# Altium PCB PCB_18_R2.PcbDoc (part 2 of 3)
Units mm, origin at the board's own origin, x right, y up, seen from the top; angles counter-clockwise.
Board outline 255 x 215.3 mm, 2 copper layers (Top Layer, Bottom Layer), stack 1.071 mm thick; 236 components, 0 nets, 1421 pads, 588 vias.
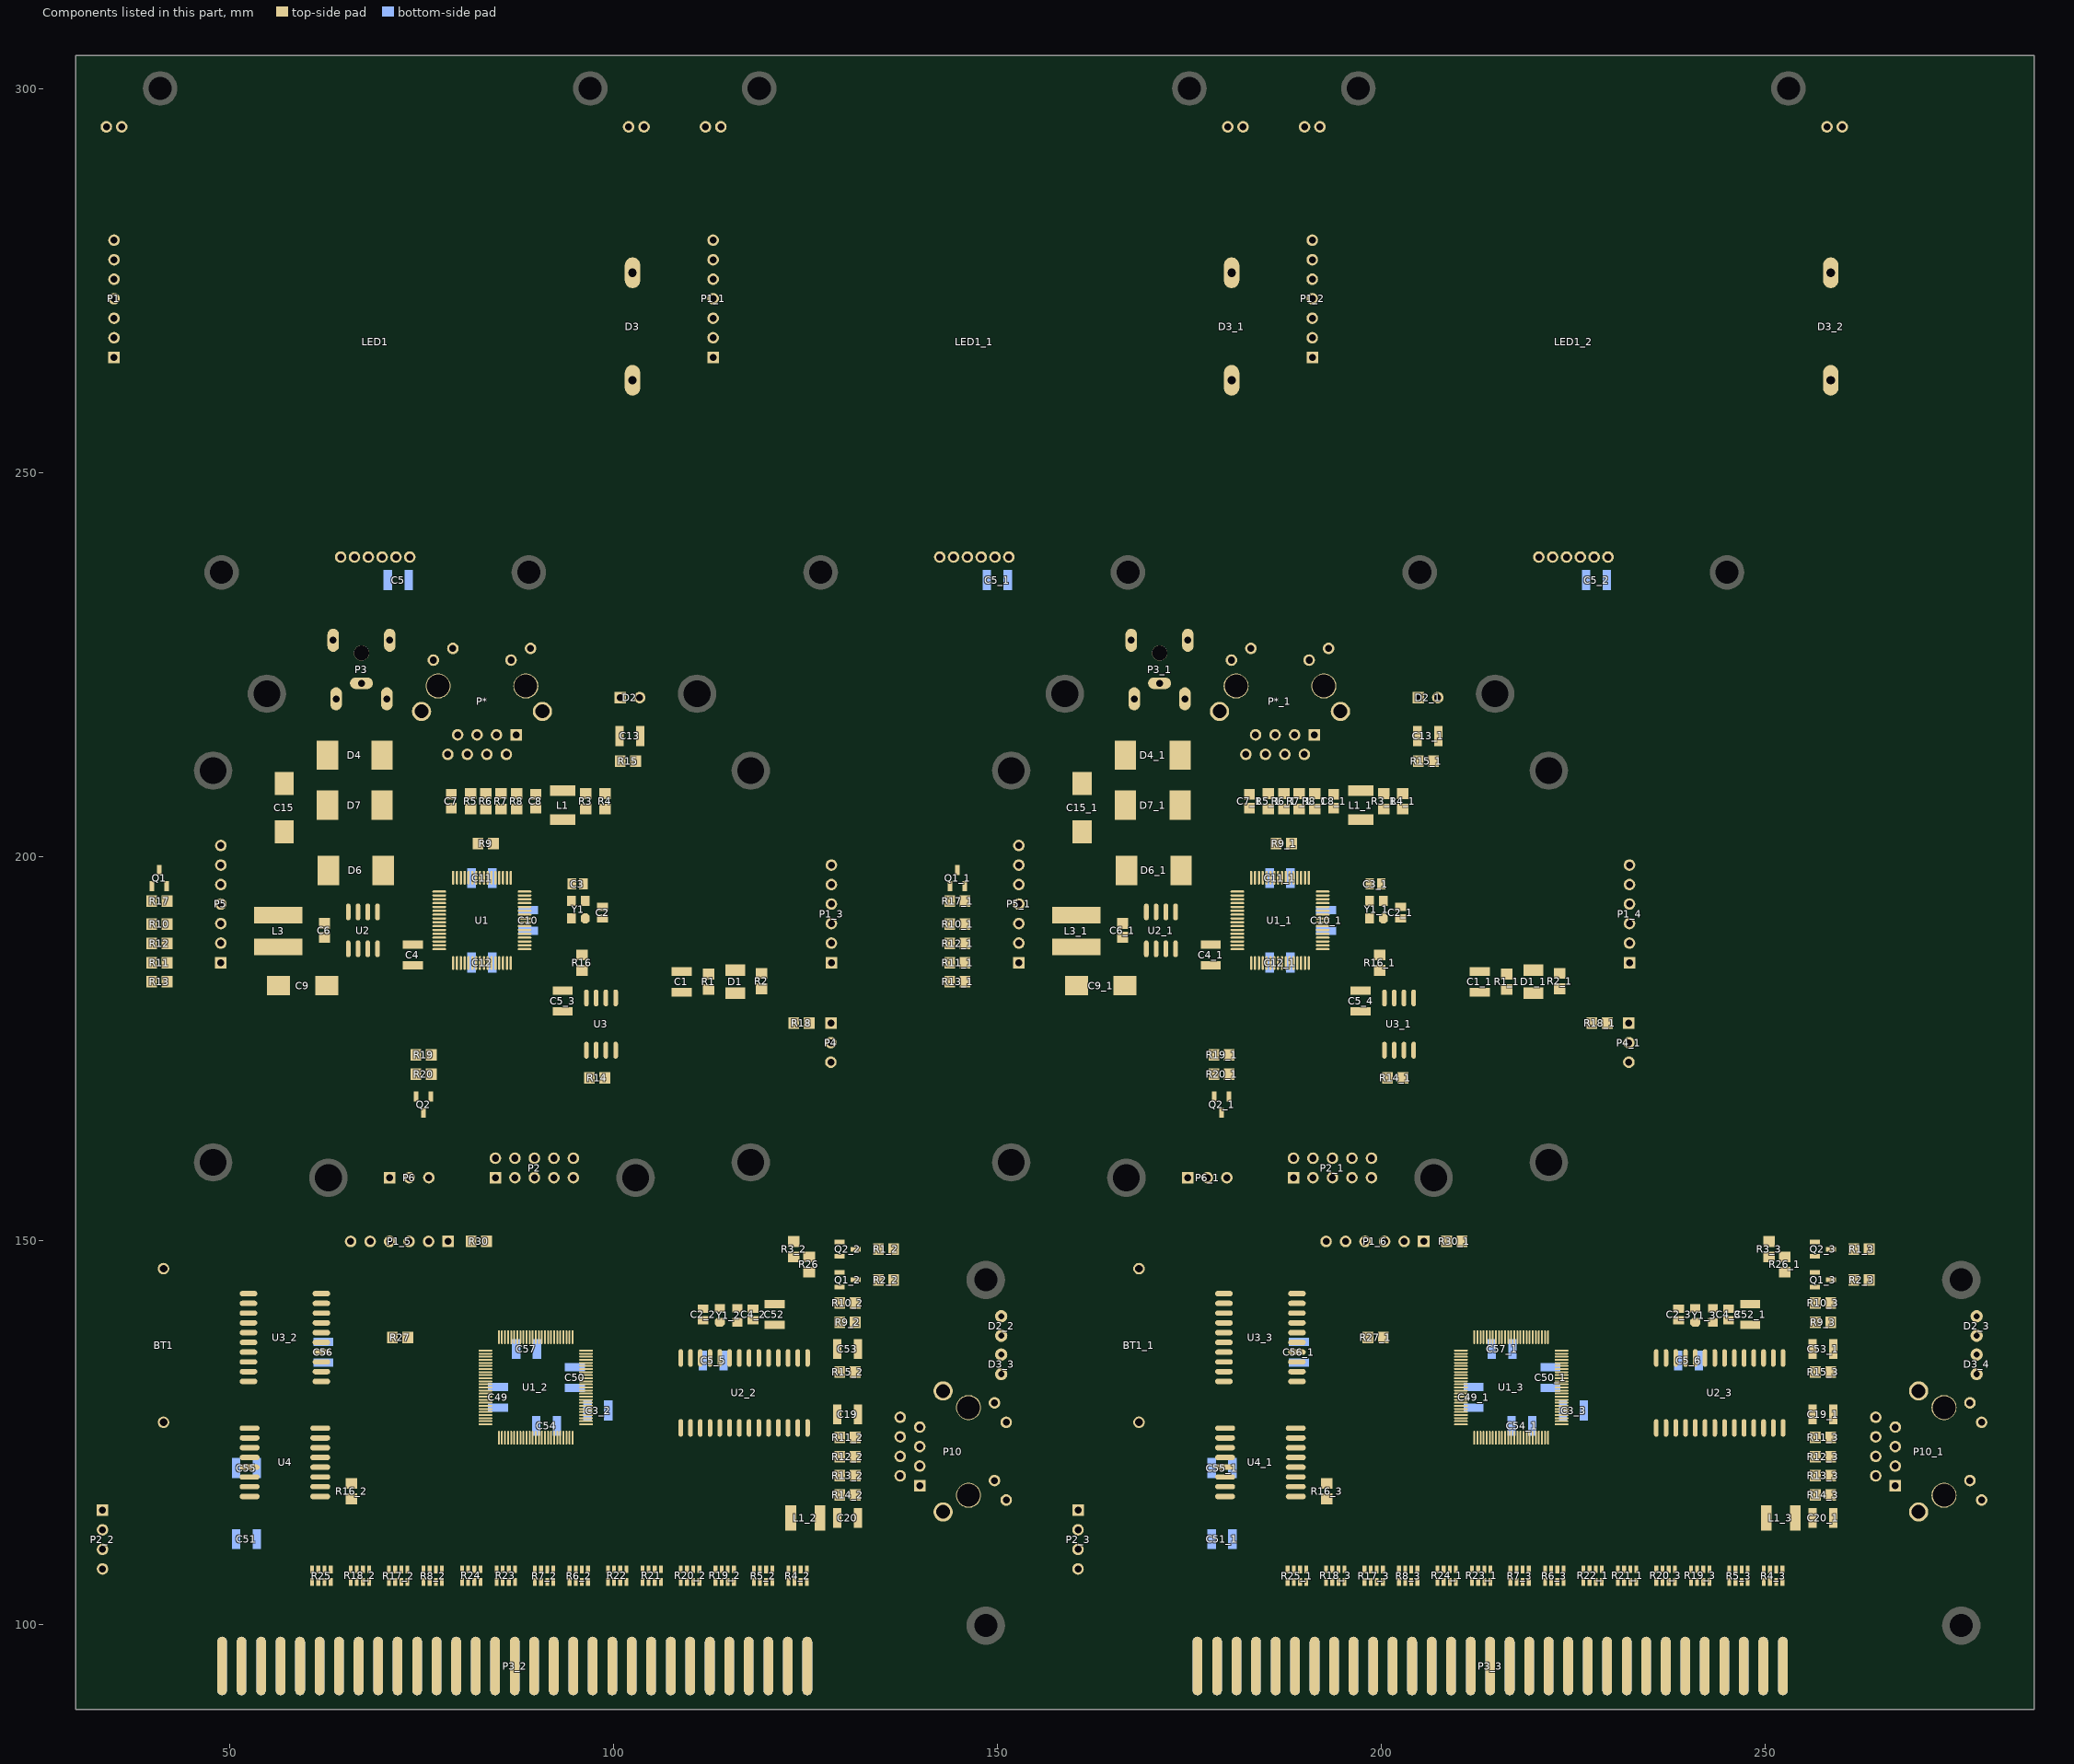
[diagram p2: the components of this part, seen from the top]

## Via types
v1: diameter 1.2, hole 0.6, Top Layer to Bottom Layer, 588 vias

## Nets (pads, with @x,y where several pads share a name; then routed paths per layer and width w, separated by ;. In a path a pad name is that pad's centre, name@x,y a point inside that pad or via, vN(x,y) a via of type N, cw(c..) or ccw(c..) an arc to the next point about the centre after c; other vN are vias at no path point) (continued)
copper on no net: | length 17755.7
  Top Layer w0.2: 52.65,125.595 v1@58.5,125.595 ; 61.85,124.325 64.425,124.325 v1(65,124.9) ; 62,131.685 64.715,131.685 v1(65,131.4) ; 62,136.765 64.265,136.765 66,138.5 v1(66,140.4) ; 70.8,107.2 70.8,109.35 70.5,109.65 70.5,130.9 73.5,133.9 78.6,133.9 79.2,133.3 83.35,133.3 ; 71.4,137.4 71.4,144.9 72.1,145.6 80.94,145.6 87.5,139.04 87.5,137.45 ; 71.6,107.2 71.6,109.31 71,109.91 71,130.65 73.75,133.4 78.4,133.4 78.9,132.9 83.35,132.9 ; 72.4,107.2 72.4,109.25 71.5,110.15 71.5,130.4 74,132.9 78.3,132.9 78.7,132.5 83.35,132.5 ; v1(72.5,142.4) 76.5,138.4 78.6,138.4 81.7,135.3 83.35,135.3 ; v1(72.6,144.4) 73.5,143.5 73.5,142 76.646,138.854 78.746,138.854 81.9,135.7 83.35,135.7 ; 73.2,107.2 73.2,109.2 72,110.4 72,130.15 74.25,132.4 77.9,132.4 78.2,132.1 83.35,132.1 ; v1(74,109.9) 72.5,111.4 72.5,128.15 74.45,130.1 83.35,130.1 ; v1(75,131.4) 75.9,130.5 83.35,130.5 ; 75.3,107.2 75.3,110.1 73,112.4 73,127.976 74.724,129.7 83.35,129.7 ; v1(76,115.4) 79.858,115.4 87.1,122.642 87.1,124.35 ; 76.1,107.2 76.1,110.05 73.5,112.65 73.5,127.834 74.966,129.3 83.35,129.3 ; 76.9,107.2 76.9,109.9 74.046,112.754 74.046,127.738 75.208,128.9 83.35,128.9 ; v1(77,113.4) 78.5,113.4 87.5,122.4 87.5,124.35 ; v1(77,117.9) 76,118.9 76,125.2 77.7,126.9 83.35,126.9 ; v1(77,119.9) 83.659,119.9 86.7,122.941 86.7,124.35 ; v1(77,121.9) 79.084,121.9 80.084,120.9 83.375,120.9 85.9,123.425 85.9,124.35 ; v1(77,124.9) 78.9,124.9 80.1,126.1 83.35,126.1 ; v1(77,131.4) 77.5,130.9 83.35,130.9 ; v1(77,135.9) 78.8,135.9 80.2,134.5 83.35,134.5 ; v1(77,141.4) 82.5,141.4 85.1,138.8 85.1,137.45 ; v1(77,143.4) 81.784,143.4 85.9,139.284 85.9,137.45 ; 77.7,107.2 77.7,109.7 74.5,112.9 74.5,127.55 75.45,128.5 83.35,128.5 ; v1(78,116.4) 76.7,116.4 75.5,117.6 75.5,125.342 77.458,127.3 83.35,127.3 ; v1(78.5,120.9) 78.954,120.446 83.563,120.446 86.3,123.183 86.3,124.35 ; v1(78.5,125.9) 79.1,126.5 83.35,126.5 ; v1(78.5,136.9) 80.5,134.9 83.35,134.9 ; v1(78.5,142.4) 82.142,142.4 85.5,139.042 85.5,137.45 ; v1(78.5,144.4) 81.426,144.4 86.3,139.526 86.3,137.45 ; 81.9,107.225 81.9,116 83.5,117.6 87.9,122 87.9,124.35 ; 82.7,107.225 82.7,116.1 88.3,121.7 88.3,124.35 ; 83.35,127.7 85.2,127.7 85.391,127.891 88.991,127.891 v1(90,128.9) 89.5,128.4 89.5,124.35 ; 83.35,128.1 84.55,128.1 85.35,128.9 v1(88,128.9) ; 83.35,131.3 87.6,131.3 v1(88,130.9) ; 83.35,131.7 86.8,131.7 v1(88,132.9) 87.2,133.7 83.35,133.7 ; 83.35,134.1 88.8,134.1 v1(90,132.9) 88.7,134.2 88.7,137.45 ; 84.8,107.225 84.8,117.6 88.7,121.5 88.7,124.35 ; 85.6,107.225 85.6,117.7 89.1,121.2 89.1,124.35 ; 87.9,137.45 87.9,143.44 88.462,144.002 88.462,148.722 89.601,149.862 101.908,149.862 107.47,144.3 107.47,125.03 109.875,122.625 110.146,122.354 111.954,122.354 ccw(c111.954,122.993) 112.593,122.993 112.593,125.638 ; 88.3,137.45 88.3,143 89.15,143.85 89.15,148.05 v1(89.5,148.4) ; 89.1,137.45 89.1,135.8 v1(92,132.9) ; 89.5,137.45 89.5,146.3 90.5,147.3 90.5,148.9 91.008,149.408 101.492,149.408 107.016,143.884 107.016,124.842 109.958,121.9 v1(114,121.9) ; v1(89.9,118.4) 89.9,124.35 ; 89.9,137.45 89.9,145.8 91.5,147.4 v1(91.5,148.4) ; 90.3,137.45 90.3,143.4 95.025,148.125 102.002,148.125 106.562,143.565 106.562,124.654 110.424,120.792 114.692,120.792 116.403,122.503 116.403,123 116.403,125.638 ; 90.7,124.35 90.7,127.6 v1(92,128.9) 94.7,126.2 94.7,124.35 94.7,123.45 95.25,122.9 v1(98.5,122.9) v1(98.5,116.7) ; 90.7,137.45 90.7,143.2 94.975,147.475 101.783,147.475 106.108,143.15 106.108,124.466 110.236,120.338 115.938,120.338 v1(116.5,120.9) ; 91.1,124.35 91.1,110.35 91.4,110.05 91.4,107.2 ; 91.1,137.45 91.1,142.9 95.075,146.875 101.595,146.875 105.654,142.816 105.654,124.278 110.048,119.884 117.084,119.884 ccw(c117.084,120.473) 117.673,120.473 117.673,125.638 ; 91.5,124.35 91.5,110.75 92.2,110.05 92.2,107.2 ; 91.5,137.45 91.5,139.4 v1(93,140.9) ; 91.9,124.35 91.9,114.079 93.754,112.225 106.275,112.225 108.8,109.7 108.8,107.225 ; 91.9,137.45 91.9,139.8 v1(93,140.9) ; 92.3,124.35 92.3,114.55 94.175,112.675 106.625,112.675 109.6,109.7 109.6,107.225 ; 92.3,137.45 92.3,140.2 v1(93,140.9) ; 92.7,124.35 92.7,115.025 94.6,113.125 107.2,113.125 110.4,109.925 110.4,107.225 ; 92.7,137.45 92.7,140.6 v1(93,140.9) ; 93.1,124.35 93.1,115.5 95.025,113.575 107.675,113.575 111.2,110.05 111.2,107.225 ; 93.1,137.45 93.1,139.026 v1(97.474,143.4) ; 93.5,124.35 93.5,115.9 95.375,114.025 108.35,114.025 108.975,113.4 115.8,113.4 118.3,110.9 118.3,107.2 ; 93.5,137.45 93.5,138.784 96.024,141.308 97.008,141.308 98.5,142.8 v1@98.5,145.107 ; 93.9,137.45 93.9,138.542 96.212,140.854 97.454,140.854 v1@99.5,142.9 ; 94.3,124.35 94.3,116.6 v1@95.25,115.65 ; 94.3,137.45 94.3,135.7 94.3,133.2 93,131.9 v1(92,130.9) 92.8,130.1 96.45,130.1 ; 94.7,137.45 94.7,138.7 96.4,140.4 98,140.4 100.5,142.9 v1(100.5,144.9) ; v1(95.5,143.4) 95.5,145.4 96.5,146.4 101.416,146.4 105.2,142.616 105.2,130.5 104.6,129.9 102.02,129.9 100.62,131.3 96.45,131.3 ; 96.45,126.1 97.411,126.1 109.626,113.886 115.935,113.886 ; 96.45,126.5 97.653,126.5 109.753,114.4 116.084,114.4 119.9,110.584 119.9,107.2 ; 96.45,126.9 97.895,126.9 109.895,114.9 116.226,114.9 120.7,110.426 120.7,107.2 ; 96.45,127.3 98.137,127.3 109.537,115.9 v1(110.5,115.9) ; 96.45,127.7 98.38,127.7 109.204,116.876 111.524,116.876 v1(112.5,115.9) ; 96.45,128.1 98.622,128.1 109.392,117.33 114.438,117.33 122.8,108.968 122.8,107.2 ; 96.45,128.5 98.864,128.5 109.559,117.805 114.605,117.805 123.6,108.81 123.6,107.2 ; 96.45,128.9 99.106,128.9 109.768,118.238 114.814,118.238 124.4,108.652 124.4,107.2 ; 96.45,129.3 99.348,129.3 109.956,118.692 115.002,118.692 121.228,112.466 125.2,108.494 125.2,107.2 ; 96.45,129.7 100.2,129.7 v1(101,128.9) ; 96.45,130.5 100.925,130.5 102.125,129.3 102.125,127.165 109.86,119.43 118.93,119.43 ccw(c118.93,120.713) 120.213,120.713 120.213,125.638 ; 96.45,131.7 100.8,131.7 102.1,130.4 104.3,130.4 104.8,130.9 104.8,142.3 101.2,145.9 97.5,145.9 v1(96.5,144.9) ; 96.45,132.1 101,132.1 101.7,131.4 v1(103.5,131.4) ; 96.45,132.5 v1@102,132.5 ; 96.45,132.9 101.1,132.9 101.6,133.4 v1(103.5,133.4) ; 96.45,133.3 100.9,133.3 v1(102,134.4) ; 96.45,133.7 99.8,133.7 101.5,135.4 v1(103.5,135.4) ; 96.45,134.1 99.3,134.1 101.6,136.4 v1(102,136.4) ; 96.45,134.5 98.7,134.5 101.6,137.4 v1(103.5,137.4) ; 96.45,134.9 98.4,134.9 101,137.5 101,139.4 v1(102,140.4) ; 96.45,135.3 98.2,135.3 100.5,137.6 100.5,140.4 101.5,141.4 v1(103.5,141.4) ; 96.45,135.7 97.8,135.7 100,137.9 100,140.8 101.6,142.4 v1(102,142.4) ; v1(101.1,118.4) 102.975,118.4 cw(c102.975,116.895) 104.039,117.959 ; 104.028,117.973 v1(106.7,115.3) ; 115.946,113.896 119.1,110.742 119.1,107.2 ; 179.65,125.595 v1@185.5,125.595 ; 188.85,124.325 191.425,124.325 v1(192,124.9) ; 189,131.685 191.715,131.685 v1(192,131.4) ; 189,136.765 191.265,136.765 193,138.5 v1(193,140.4) ; 197.8,107.2 197.8,109.35 197.5,109.65 197.5,130.9 200.5,133.9 205.6,133.9 206.2,133.3 210.35,133.3 ; 198.4,137.4 198.4,144.9 199.1,145.6 207.94,145.6 214.5,139.04 214.5,137.45 ; 198.6,107.2 198.6,109.31 198,109.91 198,130.65 200.75,133.4 205.4,133.4 205.9,132.9 210.35,132.9 ; 199.4,107.2 199.4,109.25 198.5,110.15 198.5,130.4 201,132.9 205.3,132.9 205.7,132.5 210.35,132.5 ; v1(199.5,142.4) 203.5,138.4 205.6,138.4 208.7,135.3 210.35,135.3 ; v1(199.6,144.4) 200.5,143.5 200.5,142 203.646,138.854 205.746,138.854 208.9,135.7 210.35,135.7 ; 200.2,107.2 200.2,109.2 199,110.4 199,130.15 201.25,132.4 204.9,132.4 205.2,132.1 210.35,132.1 ; v1(201,109.9) 199.5,111.4 199.5,128.15 201.45,130.1 210.35,130.1 ; v1(202,131.4) 202.9,130.5 210.35,130.5 ; 202.3,107.2 202.3,110.1 200,112.4 200,127.976 201.724,129.7 210.35,129.7 ; v1(203,115.4) 206.858,115.4 214.1,122.642 214.1,124.35 ; 203.1,107.2 203.1,110.05 200.5,112.65 200.5,127.834 201.966,129.3 210.35,129.3 ; 203.9,107.2 203.9,109.9 201.046,112.754 201.046,127.738 202.208,128.9 210.35,128.9 ; v1(204,113.4) 205.5,113.4 214.5,122.4 214.5,124.35 ; v1(204,117.9) 203,118.9 203,125.2 204.7,126.9 210.35,126.9 ; v1(204,119.9) 210.659,119.9 213.7,122.941 213.7,124.35 ; v1(204,121.9) 206.084,121.9 207.084,120.9 210.375,120.9 212.9,123.425 212.9,124.35 ; v1(204,124.9) 205.9,124.9 207.1,126.1 210.35,126.1 ; v1(204,131.4) 204.5,130.9 210.35,130.9 ; v1(204,135.9) 205.8,135.9 207.2,134.5 210.35,134.5 ; v1(204,141.4) 209.5,141.4 212.1,138.8 212.1,137.45 ; v1(204,143.4) 208.784,143.4 212.9,139.284 212.9,137.45 ; 204.7,107.2 204.7,109.7 201.5,112.9 201.5,127.55 202.45,128.5 210.35,128.5 ; v1(205,116.4) 203.7,116.4 202.5,117.6 202.5,125.342 204.458,127.3 210.35,127.3 ; v1(205.5,120.9) 205.954,120.446 210.563,120.446 213.3,123.183 213.3,124.35 ; v1(205.5,125.9) 206.1,126.5 210.35,126.5 ; v1(205.5,136.9) 207.5,134.9 210.35,134.9 ; v1(205.5,142.4) 209.142,142.4 212.5,139.042 212.5,137.45 ; v1(205.5,144.4) 208.426,144.4 213.3,139.526 213.3,137.45 ; 208.9,107.225 208.9,116 210.5,117.6 214.9,122 214.9,124.35 ; 209.7,107.225 209.7,116.1 215.3,121.7 215.3,124.35 ; 210.35,127.7 212.2,127.7 212.391,127.891 215.991,127.891 v1(217,128.9) 216.5,128.4 216.5,124.35 ; 210.35,128.1 211.55,128.1 212.35,128.9 v1(215,128.9) ; 210.35,131.3 214.6,131.3 v1(215,130.9) ; 210.35,131.7 213.8,131.7 v1(215,132.9) 214.2,133.7 210.35,133.7 ; 210.35,134.1 215.8,134.1 v1(217,132.9) 215.7,134.2 215.7,137.45 ; 211.8,107.225 211.8,117.6 215.7,121.5 215.7,124.35 ; 212.6,107.225 212.6,117.7 216.1,121.2 216.1,124.35 ; 214.9,137.45 214.9,143.44 215.462,144.002 215.462,148.722 216.601,149.862 228.908,149.862 234.47,144.3 234.47,125.03 236.875,122.625 237.146,122.354 238.954,122.354 ccw(c238.954,122.993) 239.593,122.993 239.593,125.638 ; 215.3,137.45 215.3,143 216.15,143.85 216.15,148.05 v1(216.5,148.4) ; 216.1,137.45 216.1,135.8 v1(219,132.9) ; 216.5,137.45 216.5,146.3 217.5,147.3 217.5,148.9 218.008,149.408 228.492,149.408 234.016,143.884 234.016,124.842 236.958,121.9 v1(241,121.9) ; v1(216.9,118.4) 216.9,124.35 ; 216.9,137.45 216.9,145.8 218.5,147.4 v1(218.5,148.4) ; 217.3,137.45 217.3,143.4 222.025,148.125 229.002,148.125 233.562,143.565 233.562,124.654 237.424,120.792 241.692,120.792 243.403,122.503 243.403,123 243.403,125.638 ; 217.7,124.35 217.7,127.6 v1(219,128.9) 221.7,126.2 221.7,124.35 221.7,123.45 222.25,122.9 v1(225.5,122.9) v1(225.5,116.7) ; 217.7,137.45 217.7,143.2 221.975,147.475 228.783,147.475 233.108,143.15 233.108,124.466 237.236,120.338 242.938,120.338 v1(243.5,120.9) ; 218.1,124.35 218.1,110.35 218.4,110.05 218.4,107.2 ; 218.1,137.45 218.1,142.9 222.075,146.875 228.595,146.875 232.654,142.816 232.654,124.278 237.048,119.884 244.084,119.884 ccw(c244.084,120.473) 244.673,120.473 244.673,125.638 ; 218.5,124.35 218.5,110.75 219.2,110.05 219.2,107.2 ; 218.5,137.45 218.5,139.4 v1(220,140.9) ; 218.9,124.35 218.9,114.079 220.754,112.225 233.275,112.225 235.8,109.7 235.8,107.225 ; 218.9,137.45 218.9,139.8 v1(220,140.9) ; 219.3,124.35 219.3,114.55 221.175,112.675 233.625,112.675 236.6,109.7 236.6,107.225 ; 219.3,137.45 219.3,140.2 v1(220,140.9) ; 219.7,124.35 219.7,115.025 221.6,113.125 234.2,113.125 237.4,109.925 237.4,107.225 ; 219.7,137.45 219.7,140.6 v1(220,140.9) ; 220.1,124.35 220.1,115.5 222.025,113.575 234.675,113.575 238.2,110.05 238.2,107.225 ; 220.1,137.45 220.1,139.026 v1(224.474,143.4) ; 220.5,124.35 220.5,115.9 222.375,114.025 235.35,114.025 235.975,113.4 242.8,113.4 245.3,110.9 245.3,107.2 ; 220.5,137.45 220.5,138.784 223.024,141.308 224.008,141.308 225.5,142.8 v1@225.5,145.107 ; 220.9,137.45 220.9,138.542 223.212,140.854 224.454,140.854 v1@226.5,142.9 ; 221.3,124.35 221.3,116.6 v1@222.25,115.65 ; 221.3,137.45 221.3,135.7 221.3,133.2 220,131.9 v1(219,130.9) 219.8,130.1 223.45,130.1 ; 221.7,137.45 221.7,138.7 223.4,140.4 225,140.4 227.5,142.9 v1(227.5,144.9) ; v1(222.5,143.4) 222.5,145.4 223.5,146.4 228.416,146.4 232.2,142.616 232.2,130.5 231.6,129.9 229.02,129.9 227.62,131.3 223.45,131.3 ; 223.45,126.1 224.411,126.1 236.626,113.886 242.935,113.886 ; 223.45,126.5 224.653,126.5 236.753,114.4 243.084,114.4 246.9,110.584 246.9,107.2 ; 223.45,126.9 224.895,126.9 236.895,114.9 243.226,114.9 247.7,110.426 247.7,107.2 ; 223.45,127.3 225.137,127.3 236.537,115.9 v1(237.5,115.9) ; 223.45,127.7 225.38,127.7 236.204,116.876 238.524,116.876 v1(239.5,115.9) ; 223.45,128.1 225.622,128.1 236.392,117.33 241.438,117.33 249.8,108.968 249.8,107.2 ; 223.45,128.5 225.864,128.5 236.559,117.805 241.605,117.805 250.6,108.81 250.6,107.2 ; 223.45,128.9 226.106,128.9 236.768,118.238 241.814,118.238 251.4,108.652 251.4,107.2 ; 223.45,129.3 226.348,129.3 236.956,118.692 242.002,118.692 248.228,112.466 252.2,108.494 252.2,107.2 ; 223.45,129.7 227.2,129.7 v1(228,128.9) ; 223.45,130.5 227.925,130.5 229.125,129.3 229.125,127.165 236.86,119.43 245.93,119.43 ccw(c245.93,120.713) 247.213,120.713 247.213,125.638 ; 223.45,131.7 227.8,131.7 229.1,130.4 231.3,130.4 231.8,130.9 231.8,142.3 228.2,145.9 224.5,145.9 v1(223.5,144.9) ; 223.45,132.1 228,132.1 228.7,131.4 v1(230.5,131.4) ; 223.45,132.5 v1@229,132.5 ; 223.45,132.9 228.1,132.9 228.6,133.4 v1(230.5,133.4) ; 223.45,133.3 227.9,133.3 v1(229,134.4) ; 223.45,133.7 226.8,133.7 228.5,135.4 v1(230.5,135.4) ; 223.45,134.1 226.3,134.1 228.6,136.4 v1(229,136.4) ; 223.45,134.5 225.7,134.5 228.6,137.4 v1(230.5,137.4) ; 223.45,134.9 225.4,134.9 228,137.5 228,139.4 v1(229,140.4) ; 223.45,135.3 225.2,135.3 227.5,137.6 227.5,140.4 228.5,141.4 v1(230.5,141.4) ; 223.45,135.7 224.8,135.7 227,137.9 227,140.8 228.6,142.4 v1(229,142.4) ; v1(228.1,118.4) 229.975,118.4 cw(c229.975,116.895) 231.039,117.959 ; 231.028,117.973 v1(233.7,115.3) ; 242.946,113.896 246.1,110.742 246.1,107.2
  Top Layer w0.254: 33.5,109.82 36.38,109.82 38.8,107.4 56.5,107.4 v1(57.5,108.4) ; 33.5,112.36 35.465,112.36 39.905,107.92 55.02,107.92 v1(57.5,110.4) ; 33.5,114.9 34.75,114.9 40.75,108.9 v1(54.14,108.9) ; 39.55,183.35 39.55,184.05 38.4,185.2 38.4,192.7 39.95,194.25 39.95,196.15 ; 39.9,186.2 39.9,192.3 40.3,192.7 44.1,192.7 45.9,194.5 45.9,197.7 47.1,198.9 48.9,198.9 ; 40.9,198.25 40.9,199.4 42.94,201.44 48.9,201.44 ; 41.44,126.36 41.44,129.015 49.19,136.765 52.5,136.765 ; 41.85,196.15 41.85,194.25 41.9,194.2 v1(43.9,194.2) ; 41.9,183.7 46.7,183.7 54.7,175.7 v1(71.9,175.7) ; 41.9,186.2 v1(45.9,186.2) ; 41.9,188.7 46.828,188.7 ; 41.9,191.2 v1@45.9,191.2 ; 48.9,186.2 48.9,184.6 55.5,178 98.258,178 99.035,178.777 99.035,181.6 99.035,186.265 96.85,188.45 88.45,188.45 ; 48.9,196.36 47.56,196.36 46.881,195.681 46.881,184.619 54.868,176.632 99.032,176.632 101.2,178.8 101.2,185.6 97.35,189.45 88.45,189.45 ; 48.98,191.2 47.9,191.2 47.4,190.7 47.4,185.108 55.208,177.3 98.6,177.3 100.305,179.005 100.305,185.795 97.15,188.95 88.45,188.95 ; v1(50,124.4) v1@50.075,124.325 ; 51.38,193.82 51.4,193.8 ; 52.5,132.955 49.4,132.955 49.004,132.559 49.004,118.396 49.425,117.975 57.425,117.975 v1(62,113.4) 63.2,112.2 63.2,107.2 ; 52.5,134.225 49.4,134.225 48.5,133.325 48.5,117.8 49.595,116.705 56.695,116.705 v1(62,111.4) 62.4,111 62.4,107.2 ; 56.4,182.95 58.85,185.4 68.2,185.4 69.305,186.505 69.305,188 ; 56.68,94.64 56.68,100.58 60.8,104.7 60.8,105.575 ; 59.22,94.64 59.22,102.22 61.6,104.6 61.6,105.575 ; v1(59.5,108.4) 60.3,108.4 60.8,107.9 60.8,107.2 ; v1@59.503,134.3 60.848,132.955 62,132.955 ; 61.6,107.2 61.6,110.3 56.5,115.4 49.6,115.4 48,117 48,133.9 49.595,135.495 52.5,135.495 56.08,135.495 58.6,132.975 58.6,127.5 60.505,125.595 61.85,125.595 ; 61.74,94.68 61.74,99.14 63.9,101.3 66.6,101.3 67.4,102.1 67.4,105.6 ; 61.75,116.705 65.595,116.705 65.9,116.4 ; 61.75,117.975 65.9,117.975 ; 62,134.225 66.175,134.225 67.5,132.9 67.5,115.4 v1(66.498,114.398) ; 62,138.035 63.735,138.035 65,139.3 65,142.4 70.6,148 82.7,148 83.5,148.8 83.5,149.9 ; 62.4,105.575 62.4,104 v1(62.5,103.9) ; 62.4,189.05 62.65,189.05 63.7,188 65.495,188 ; 63.2,105.575 63.2,105.3 63.5,105 v1(63.5,102.4) ; 64.28,94.68 64.3,94.7 64.3,99.5 65.1,100.3 66.7,100.3 68.2,101.8 68.2,105.6 ; v1(65,103.9) 65.8,104.7 65.8,105.6 ; 65.8,107.225 65.8,108.7 68.538,111.438 68.538,145.188 70.866,147.516 85.286,147.516 87.5,145.302 v1(87.5,144.9) ; v1(66,102.4) 66.6,103 66.6,105.6 ; v1(66.5,110.9) 68,112.4 68,140.9 v1(67.5,141.4) ; 66.6,107.225 66.6,108.75 69,111.15 69,144.9 71.162,147.062 84.696,147.062 85.896,145.862 85.898,145.862 86.462,145.298 86.462,145.296 86.5,145.258 v1(86.5,143.4) ; 66.82,94.68 66.82,99.72 68.538,101.438 77.738,101.438 79.8,103.5 80.3,104 80.3,105.6 ; 67.4,107.225 67.4,108.8 69.5,110.9 69.5,144.65 71.458,146.608 83.792,146.608 v1(85.5,144.9) ; 68.2,107.225 68.2,108.85 70,110.65 70,144.474 71.68,146.154 81.746,146.154 v1(84.5,143.4) ; 69.36,94.68 69.36,99.36 70.984,100.984 78.084,100.984 80.1,103 81.1,104 81.1,105.6 ; v1(70.5,102.4) 70.5,104.9 70.8,105.2 70.8,105.575 ; v1(71.5,103.9) 71.6,104 71.6,105.575 ; 71.9,94.68 71.9,99.5 72.93,100.53 78.43,100.53 81.9,104 81.9,105.6 ; 72.4,105.575 72.4,104.8 72.5,104.7 v1(72.5,102.4) ; 73.2,105.575 73.2,105.3 73.5,105 v1(73.5,103.9) ; v1(73.4,191.95) 77.35,191.95 ; v1@73.4,193.7 73.4,193.4 73.7,193.4 74.65,192.45 77.35,192.45 ; 73.9,188.55 73.9,189.5 75.35,190.95 77.35,190.95 ; 74.3,171.7 74.3,168.8 74.35,168.75 ; v1(74.4,200.7) 74.232,200.532 74.232,194.321 75.603,192.95 77.35,192.95 ; 74.44,94.68 74.44,99.54 74.976,100.076 78.676,100.076 80.6,102 82.7,104.1 82.7,105.6 ; v1(75,102.4) 75,105 75.3,105.3 75.3,105.575 ; v1(75.4,202.2) 75.4,199.842 74.726,199.168 74.726,194.574 75.85,193.45 77.35,193.45 ; v1(76,103.9) 76.1,104 76.1,105.575 ; v1(76,127.5) 75.038,126.538 75.038,115.002 75.04,115 75.038,114.998 75.038,113.162 76.8,111.4 79.5,111.4 81.1,109.8 81.1,107.225 ; 76.25,168.75 76.25,174.15 76.3,174.2 87.725,174.2 92.775,169.15 100.075,169.15 106.705,175.78 128.32,175.78 ; v1(76.4,200.7) 76.4,200.2 76.4,199.9 75.3,198.8 75.3,194.7 76.05,193.95 77.35,193.95 ; 76.575,225.578 84.278,225.578 85.7,227 87.2,227 96.4,217.8 96.4,208.7 95.9,208.2 ; 76.9,105.575 76.9,104.8 77,104.7 v1(77,102.4) ; 76.98,94.68 76.98,99.38 77.2,99.6 79.2,99.6 81.1,101.5 83.7,101.5 84.8,102.6 84.8,105.6 ; 77.35,191.45 79.65,191.45 v1(79.9,191.7) ; v1(77.4,202.2) 77.4,200.2 78,199.6 80,199.6 81.15,198.45 81.15,197.25 ; 77.7,105.575 77.7,105.3 78,105 v1(78,103.9) ; v1(78.4,200.7) 79.6,200.7 81.1,199.2 81.65,198.65 81.65,197.25 ; 78.455,213.31 76.797,211.652 76.797,206.953 77.55,206.2 83.4,206.2 ; 78.5,149.9 81.55,149.9 ; 78.9,208.55 v1(78.9,210.7) ; v1(79,109.4) 80.3,108.1 80.3,107.225 ; 79.52,94.68 79.52,99.02 81.5,101 84.1,101 85.6,102.5 85.6,105.6 ; 79.65,186.15 79.65,188.45 v1(79.9,188.7) 80.15,188.45 80.15,186.15 ; 79.725,215.85 78.378,215.85 76.116,213.588 76.116,206.012 77.154,204.974 84.774,204.974 86,206.2 90.55,206.2 91,206.2 93.4,208.6 ; v1(79.9,194.7) 80.389,194.211 80.511,194.211 82.125,195.825 83.975,195.825 84.15,196 84.15,197.25 ; 80.65,186.15 80.65,187.45 81.9,188.7 v1(82.9,188.7) 83.15,188.45 83.15,186.15 83.15,183.55 84.15,182.55 89.05,182.55 93.4,182.55 ; v1(81.4,181.7) 82.15,182.45 82.15,186.15 ; 81.4,208.2 81.4,212.905 80.995,213.31 80.995,216.705 80.582,217.118 79.004,217.118 75.662,213.776 75.662,205.824 76.966,204.52 86.122,204.52 91.154,199.488 91.154,195.454 90.15,194.45 88.45,194.45 ; 82.06,94.68 82.06,99.4 83.06,100.4 84.5,100.4 86.4,102.3 86.4,105.6 ; 82.15,197.25 82.15,199.45 v1(79.4,202.2) ; 82.4,201.7 83.15,200.95 83.15,197.25 ; 82.65,186.15 82.65,182.45 v1(83.4,181.7) ; 82.65,195.825 82.65,197.25 ; v1@83.15,194.675 83.875,194.675 85.15,195.95 85.15,197.25 ; v1(83.4,199.7) 83.65,199.45 83.65,197.25 ; 83.4,208.2 83.4,210.1 84.805,211.505 84.805,215.85 83.083,217.572 78.816,217.572 75.208,213.964 75.208,205.636 76.778,204.066 85.934,204.066 90.66,199.34 90.66,195.807 89.803,194.95 88.35,194.95 ; 83.535,213.185 83.535,213.31 ; 83.55,149.9 v1(85,149.9) ; 83.65,186.15 83.65,187.45 85.4,189.2 v1(85.9,188.7) 85.5,189.1 85.5,189.3 86.65,190.45 88.45,190.45 ; 84.15,186.15 84.15,184.25 84.5,183.9 89.1,183.9 v1(90.4,185.2) ; 84.4,201.7 84.65,201.45 84.65,197.25 ; 84.6,94.68 84.6,99.001 87.2,101.601 87.2,105.6 ; 85.4,208.2 86.075,208.875 86.075,213.31 86.075,217.025 85.074,218.026 78.628,218.026 74.754,214.152 74.754,205.448 76.59,203.612 85.042,203.612 86.15,202.504 86.15,197.25 ; v1@85.425,194.7 v1(85.9,194.7) 86.65,195.45 ; 85.65,197.25 85.65,202.362 84.854,203.158 76.402,203.158 74.3,205.26 74.3,214.34 78.44,218.48 85.82,218.48 87.345,216.955 87.345,215.85 87.4,215.795 87.4,208.2 ; v1@85.7,194.5 v1@85.7,194.7 ; 86.4,107.225 86.4,116.3 v1(87,116.9) ; 86.65,197.25 86.65,195.45 ; 87.14,94.68 87.14,100.8 87.627,101.287 97.212,101.287 99.3,103.375 99.3,105.6 ; 87.2,107.225 87.2,114.6 v1(88,115.4) ; 88.35,190.95 95.35,190.95 96.35,191.95 98.6,191.95 ; 88.35,191.45 91.85,191.45 94.6,194.2 ; 88.45,187.95 96.537,187.95 97.765,186.722 97.765,181.6 ; 88.45,189.95 119.21,189.95 119.855,189.95 120.59,189.95 121.45,189.95 125.32,193.82 128.4,193.82 ; 88.45,191.95 86.15,191.95 v1(85.9,191.7) 85.9,192.7 87.15,193.95 88.45,193.95 ; 88.45,192.45 90.95,192.45 92.516,194.016 92.516,198.317 93.399,199.2 122.5,199.2 125.34,196.36 128.4,196.36 ; 88.45,192.95 90.45,192.95 92.062,194.562 92.062,198.505 93.257,199.7 98.9,199.7 v1(99.9,200.7) ; 88.45,193.45 90.15,193.45 91.608,194.908 91.608,198.693 93.614,200.699 v1(97.9,200.699) ; 88.45,195.45 86.65,195.45 ; 89.225,227.102 98.9,217.427 98.9,208.2 ; v1(89.5,102.4) 89.5,105 89.8,105.3 89.8,105.575 ; v1(89.5,110.9) 89.5,107.8 89.8,107.5 89.8,107.2 ; 89.68,94.68 89.68,99.567 90.946,100.833 97.4,100.833 100.1,103.533 100.1,105.6 ; v1(90.5,103.9) 90.6,104 90.6,105.575 ; 90.6,107.2 v1@90.6,109.5 ; 91.4,105.575 91.4,104.9 91.5,104.8 v1(91.5,102.4) ; 92.2,105.575 92.2,105.2 92.5,104.9 v1(92.5,103.9) ; 92.22,94.68 92.22,99.567 93.032,100.379 97.588,100.379 100.9,103.691 100.9,105.6 ; v1(92.393,201.193) 93.4,202.2 93.4,204.8 ; v1(94,102.4) 94,105 94.3,105.3 94.3,105.575 ; v1(94,110.9) 94,107.8 94.3,107.5 94.3,107.2 ; v1(94.4,202.6) 99.7,202.6 100.9,203.8 100.9,212.45 100.9,220.7 ; 94.55,191.95 94.55,192.45 96.35,194.25 ; 94.55,194.25 94.6,194.3 94.6,196.45 ; 94.76,94.68 94.76,98.677 96.008,99.925 97.776,99.925 101.7,103.849 101.7,105.6 ; v1(94.9,171.2) 96.9,171.2 ; v1(95,103.9) 95.1,104 95.1,105.575 ; v1(95,109.4) 95.1,109.3 95.1,107.2 ; 95.9,105.575 95.9,104.7 96,104.6 v1(96,102.4) ; 95.9,107.2 96,107.3 v1(96,110.9) ; 95.9,185.2 96.495,184.605 96.495,181.6 ; 96.1,196.45 96.1,194.5 96.35,194.25 ; v1(96.4,204.2) 96.4,206.2 ; 96.7,105.575 96.7,105.2 97,104.9 v1(97,103.9) ; 96.7,107.2 96.7,109.1 v1(97,109.4) ; 97.3,94.68 97.425,94.805 97.425,98.932 98.843,100.35 100.2,100.35 103.8,103.95 103.8,105.6 ; 98.6,193.45 97.15,193.45 96.35,194.25 ; 98.9,171.2 99.035,171.335 99.035,174.8 ; v1(98.9,204.2) 98.9,206.2 ; 99.3,107.225 99.3,110.7 v1(99.5,110.9) ; v1@99.5,142.9 v1(99.5,143.4) ; 99.84,94.68 99.975,94.815 99.975,98.95 104.6,103.575 104.6,105.6 ; 100.1,107.225 100.1,109 v1(100.5,109.4) ; 100.9,107.225 100.9,108.3 101.5,108.9 v1(101.5,110.9) ; 101.7,107.225 101.7,107.7 102.5,108.5 v1(102.5,109.4) ; 102.38,94.68 102.475,94.775 102.475,99.875 105.4,102.8 105.4,105.6 ; v1(103.5,110.9) 103.5,107.8 103.8,107.5 103.8,107.225 ; v1@104.5,108.9 104.6,108.8 104.6,107.225 ; 104.92,94.68 104.95,94.71 104.95,99.9 106.2,101.15 106.2,105.6 ; 105.4,107.225 105.412,107.237 v1@105.412,110.9 ; 106.2,107.225 v1@106.2,109.4 ; v1(107,146.9) 107.5,146.4 117.5,146.4 120.95,149.85 123.5,149.85 126.478,149.85 ; 107.46,94.68 107.46,99.96 108.8,101.3 108.8,105.6 ; v1(108,145.4) 108.5,145.9 125.5,145.9 129.4,145.9 129.45,145.85 ; 108.9,182.3 113.3,182.3 118.8,182.3 119.3,182.8 ; 109.6,105.6 109.6,101.2 110.02,100.78 110.02,94.64 ; 110.053,125.638 110.053,126.953 111.5,128.4 ; 110.053,134.738 110.053,136.697 108.646,138.104 108.646,142.488 110.637,144.479 123.788,144.479 126.367,141.9 129.5,141.9 ; 110.4,105.6 110.4,102 112.54,99.86 112.54,94.68 ; 111.2,105.6 111.2,103.6 115.08,99.72 115.08,94.68 ; v1@111.3,123.4 v1(111.323,123.423) 111.323,125.638 ; 111.323,134.738 111.323,136.069 109.1,138.292 109.1,142.3 110.825,144.025 123.6,144.025 128.225,139.4 129.5,139.4 ; 111.7,139.55 113.863,139.55 113.863,134.738 ; 112.4,184.7 112.9,185.2 116.5,185.2 ; 112.466,130.188 112.593,130.315 ; v1(113,110.9) 113,107.8 113.3,107.5 113.3,107.225 ; 113.3,105.6 113.3,103.574 117.62,99.254 117.62,94.68 ; v1(114,109.4) 114.1,109.3 114.1,107.225 ; 114.1,105.6 114.1,103.416 117.759,99.757 119.543,99.757 120.16,99.14 120.16,94.68 ; 114.9,105.6 114.9,103.258 117.947,100.211 122.289,100.211 122.7,99.8 122.7,94.68 ; 114.9,107.225 114.912,107.237 114.912,110.812 v1(115,110.9) ; v1@115.1,123.4 v1(115.133,123.433) 115.133,125.638 ; 115.133,134.738 115.133,140.453 115.868,141.188 ; 115.7,105.6 115.7,103.1 118.135,100.665 124.435,100.665 125.24,99.86 125.24,94.68 ; 115.7,107.225 115.7,109.1 v1(116,109.4) ; 116.163,141.188 116.301,141.05 118.2,141.05 ; v1(118,103.9) 118,105 118.3,105.3 118.3,105.575 ; v1@118.943,120.9 118.943,125.638 ; v1(119,102.4) 119,105.575 ; 119.9,105.575 119.9,104 v1(120,103.9) ; 119.9,184.8 119.3,184.8 119.6,184.8 127,184.8 128.4,186.2 ; 120.7,105.575 120.7,104.56 121,104.26 v1(121,102.4) ; v1(122,103.9) 122,104.5 122.8,105.3 122.8,105.575 ; 122.753,125.638 122.753,123.838 123.896,122.695 126.69,122.695 127.706,123.711 127.706,128.806 129.275,130.375 138.025,130.375 141.168,127.232 141.168,125.108 140.533,124.473 137.358,124.473 131.5,124.473 ; 122.753,134.738 122.753,136.653 124.362,138.262 132.438,138.262 142.584,128.116 142.584,120.809 139.898,118.123 138.675,116.9 131.5,116.9 ; v1(123,102.4) 123,104.258 123.6,104.858 123.6,105.575 ; 123,114 123.1,113.9 ; 123.5,149.9 126.428,149.9 126.478,149.85 ; 123.51,178.32 123.51,181.01 124.65,182.15 129.85,182.15 130.95,183.25 130.95,187.4 129.61,188.74 128.4,188.74 ; v1(124,103.9) 124.4,104.3 124.4,105.575 ; 124.023,125.638 124.023,123.838 124.712,123.149 126.502,123.149 127.252,123.899 127.252,128.923 129.158,130.829 138.213,130.829 141.622,127.42 141.622,122.387 139.898,120.663 132.737,120.663 131.5,121.9 ; 124.023,134.738 124.023,137.173 124.658,137.808 132.184,137.808 142.13,127.862 142.13,121.33 140.193,119.393 137.358,119.393 131.627,119.393 131.5,119.266 ; v1@125.2,102.44 125.2,105.575 ; 125.293,125.638 125.293,126.505 126.4,127.612 126.4,129.7 129.5,132.8 129.5,133.236 ; 125.51,178.32 128.32,178.32 ; v1(127.5,119.4) 129.5,119.4 ; 128.896,134.934 128.896,135.776 ; 129.15,118.916 129.5,119.266 ; 129.5,121.9 129.5,124.473 129.5,126.79 129.214,127.077 129.5,127.363 129.5,128.4 130.6,129.5 134.871,129.5 137.358,127.013 ; 131.5,132.9 131.85,133.25 131.85,135.9 ; 131.5,139.4 134.3,139.4 141.154,132.546 145.973,132.546 149.626,128.893 ; 131.5,141.9 132.442,141.9 141.342,133 147.059,133 150.715,129.344 152.3,127.759 152.3,117.393 151.15,116.243 ; 131.55,144.9 134.5,144.9 ; 131.55,148.9 134.5,148.9 ; 131.85,134 131.852,133.998 v1(133.548,133.998) ; 136.5,144.9 148.77,132.63 150.5,132.63 ; 136.5,148.9 147.77,137.63 150.5,137.63 ; 143.45,183.35 143.45,184.05 142.3,185.2 142.3,192.7 143.85,194.25 143.85,196.15 ; 143.8,186.2 143.8,192.3 144.2,192.7 148,192.7 149.8,194.5 149.8,197.7 151,198.9 152.8,198.9 ; 144.8,198.25 144.8,199.4 146.84,201.44 152.8,201.44 ; 145.75,196.15 145.75,194.25 145.8,194.2 v1(147.8,194.2) ; 145.8,183.7 150.6,183.7 158.6,175.7 v1(175.8,175.7) ; 145.8,186.2 v1(149.8,186.2) ; 145.8,188.7 150.728,188.7 ; 145.8,191.2 v1@149.8,191.2 ; 152.8,186.2 152.8,184.6 159.4,178 202.158,178 202.935,178.777 202.935,181.6 202.935,186.265 200.75,188.45 192.35,188.45 ; 152.8,196.36 151.46,196.36 150.781,195.681 150.781,184.619 158.768,176.632 202.932,176.632 205.1,178.8 205.1,185.6 201.25,189.45 192.35,189.45 ; 152.88,191.2 151.8,191.2 151.3,190.7 151.3,185.108 159.108,177.3 202.5,177.3 204.205,179.005 204.205,185.795 201.05,188.95 192.35,188.95 ; 155.28,193.82 155.3,193.8 ; 160.3,182.95 162.75,185.4 172.1,185.4 173.205,186.505 173.205,188 ; 160.5,109.82 163.38,109.82 165.8,107.4 183.5,107.4 v1(184.5,108.4) ; 160.5,112.36 162.465,112.36 166.905,107.92 182.02,107.92 v1(184.5,110.4) ; 160.5,114.9 161.75,114.9 167.75,108.9 v1(181.14,108.9) ; 166.3,189.05 166.55,189.05 167.6,188 169.395,188 ; 168.44,126.36 168.44,129.015 176.19,136.765 179.5,136.765 ; v1(177,124.4) v1@177.075,124.325 ; v1(177.3,191.95) 181.25,191.95 ; v1(177.299,193.699) 177.3,193.4 177.6,193.4 178.55,192.45 181.25,192.45 ; 177.8,188.55 177.8,189.5 179.25,190.95 181.25,190.95 ; 178.2,171.7 178.2,168.8 178.25,168.75 ; v1(178.3,200.7) 178.132,200.532 178.132,194.321 179.503,192.95 181.25,192.95 ; v1(179.3,202.2) 179.3,199.842 178.626,199.168 178.626,194.574 179.75,193.45 181.25,193.45 ; 179.5,132.955 176.4,132.955 176.004,132.559 176.004,118.396 176.425,117.975 184.425,117.975 v1(189,113.4) 190.2,112.2 190.2,107.2 ; 179.5,134.225 176.4,134.225 175.5,133.325 175.5,117.8 176.595,116.705 183.695,116.705 v1(189,111.4) 189.4,111 189.4,107.2 ; 180.15,168.75 180.15,174.15 180.2,174.2 191.625,174.2 196.675,169.15 203.975,169.15 210.605,175.78 232.22,175.78 ; v1(180.3,200.7) 180.3,200.2 180.3,199.9 179.2,198.8 179.2,194.7 179.95,193.95 181.25,193.95 ; 180.475,225.578 188.178,225.578 189.6,227 191.1,227 200.3,217.8 200.3,208.7 199.8,208.2 ; 181.25,191.45 183.55,191.45 v1(183.8,191.7) ; v1(181.3,202.2) 181.3,200.2 181.9,199.6 183.9,199.6 185.05,198.45 185.05,197.25 ; v1(182.3,200.7) 183.5,200.7 185,199.2 185.55,198.65 185.55,197.25 ; 182.355,213.31 180.697,211.652 180.697,206.953 181.45,206.2 187.3,206.2 ; 182.8,208.55 v1(182.8,210.7) ; 183.55,186.15 183.55,188.45 v1(183.8,188.7) 184.05,188.45 184.05,186.15 ; 183.625,215.85 182.278,215.85 180.016,213.588 180.016,206.012 181.054,204.974 188.674,204.974 189.9,206.2 194.45,206.2 194.9,206.2 197.3,208.6 ; 183.68,94.64 183.68,100.58 187.8,104.7 187.8,105.575 ; v1(183.8,194.7) 184.289,194.211 184.411,194.211 186.025,195.825 187.875,195.825 188.05,196 188.05,197.25 ; 184.55,186.15 184.55,187.45 185.8,188.7 v1(186.8,188.7) 187.05,188.45 187.05,186.15 187.05,183.55 188.05,182.55 192.95,182.55 197.3,182.55 ; v1(185.3,181.7) 186.05,182.45 186.05,186.15 ; 185.3,208.2 185.3,212.905 184.895,213.31 184.895,216.705 184.482,217.118 182.904,217.118 179.562,213.776 179.562,205.824 180.866,204.52 190.022,204.52 195.054,199.488 195.054,195.454 194.05,194.45 192.35,194.45 ; 186.05,197.25 186.05,199.45 v1(183.3,202.2) ; 186.22,94.64 186.22,102.22 188.6,104.6 188.6,105.575 ; 186.3,201.7 187.05,200.95 187.05,197.25 ; v1(186.5,108.4) 187.3,108.4 187.8,107.9 187.8,107.2 ; v1@186.503,134.3 187.848,132.955 189,132.955 ; 186.55,186.15 186.55,182.45 v1(187.3,181.7) ; 186.55,195.825 186.55,197.25 ; v1@187.05,194.675 187.775,194.675 189.05,195.95 189.05,197.25 ; v1(187.3,199.7) 187.55,199.45 187.55,197.25 ; 187.3,208.2 187.3,210.1 188.705,211.505 188.705,215.85 186.983,217.572 182.716,217.572 179.108,213.964 179.108,205.636 180.678,204.066 189.834,204.066 194.56,199.34 194.56,195.807 193.703,194.95 192.25,194.95 ; 187.435,213.185 187.435,213.31 ; 187.55,186.15 187.55,187.45 189.3,189.2 v1(189.8,188.7) 189.4,189.1 189.4,189.3 190.55,190.45 192.35,190.45 ; 188.05,186.15 188.05,184.25 188.4,183.9 193,183.9 v1(194.3,185.2) ; 188.3,201.7 188.55,201.45 188.55,197.25 ; 188.6,107.2 188.6,110.3 183.5,115.4 176.6,115.4 175,117 175,133.9 176.595,135.495 179.5,135.495 183.08,135.495 185.6,132.975 185.6,127.5 187.505,125.595 188.85,125.595 ; 188.74,94.68 188.74,99.14 190.9,101.3 193.6,101.3 194.4,102.1 194.4,105.6 ; 188.75,116.705 192.595,116.705 192.9,116.4 ; 188.75,117.975 192.9,117.975 ; 189,134.225 193.175,134.225 194.5,132.9 194.5,115.4 v1(193.498,114.398) ; 189,138.035 190.735,138.035 192,139.3 192,142.4 197.6,148 209.7,148 210.5,148.8 210.5,149.9 ; 189.3,208.2 189.975,208.875 189.975,213.31 189.975,217.025 188.974,218.026 182.528,218.026 178.654,214.152 178.654,205.448 180.49,203.612 188.942,203.612 190.05,202.504 190.05,197.25 ; v1@189.325,194.7 v1(189.8,194.7) 190.55,195.45 ; 189.4,105.575 189.4,104 v1(189.5,103.9) ; 189.55,197.25 189.55,202.362 188.754,203.158 180.302,203.158 178.2,205.26 178.2,214.34 182.34,218.48 189.72,218.48 191.245,216.955 191.245,215.85 191.3,215.795 191.3,208.2 ; v1@189.6,194.5 v1@189.6,194.7 ; 190.2,105.575 190.2,105.3 190.5,105 v1(190.5,102.4) ; 190.55,197.25 190.55,195.45 ; 191.28,94.68 191.3,94.7 191.3,99.5 192.1,100.3 193.7,100.3 195.2,101.8 195.2,105.6 ; v1(192,103.9) 192.8,104.7 192.8,105.6 ; 192.25,190.95 199.25,190.95 200.25,191.95 202.5,191.95 ; 192.25,191.45 195.75,191.45 198.5,194.2 ; 192.35,187.95 200.437,187.95 201.665,186.722 201.665,181.6 ; 192.35,189.95 223.11,189.95 223.755,189.95 224.49,189.95 225.35,189.95 229.22,193.82 232.3,193.82 ; 192.35,191.95 190.05,191.95 v1(189.8,191.7) 189.8,192.7 191.05,193.95 192.35,193.95 ; 192.35,192.45 194.85,192.45 196.416,194.016 196.416,198.317 197.299,199.2 226.4,199.2 229.24,196.36 232.3,196.36 ; 192.35,192.95 194.35,192.95 195.962,194.562 195.962,198.505 197.157,199.7 202.8,199.7 v1(203.8,200.7) ; 192.35,193.45 194.05,193.45 195.508,194.908 195.508,198.693 197.514,200.699 v1(201.8,200.699) ; 192.35,195.45 190.55,195.45 ; 192.8,107.225 192.8,108.7 195.538,111.438 195.538,145.188 197.866,147.516 212.286,147.516 214.5,145.302 v1(214.5,144.9) ; v1(193,102.4) 193.6,103 193.6,105.6 ; 193.125,227.102 202.8,217.427 202.8,208.2 ; v1(193.5,110.9) 195,112.4 195,140.9 v1(194.5,141.4) ; 193.6,107.225 193.6,108.75 196,111.15 196,144.9 198.162,147.062 211.696,147.062 212.896,145.862 212.898,145.862 213.462,145.298 213.462,145.296 213.5,145.258 v1(213.5,143.4) ; 193.82,94.68 193.82,99.72 195.538,101.438 204.738,101.438 206.8,103.5 207.3,104 207.3,105.6 ; 194.4,107.225 194.4,108.8 196.5,110.9 196.5,144.65 198.458,146.608 210.792,146.608 v1(212.5,144.9) ; 195.2,107.225 195.2,108.85 197,110.65 197,144.474 198.68,146.154 208.746,146.154 v1(211.5,143.4) ; v1(196.293,201.193) 197.3,202.2 197.3,204.8 ; 196.36,94.68 196.36,99.36 197.984,100.984 205.084,100.984 207.1,103 208.1,104 208.1,105.6 ; v1(197.5,102.4) 197.5,104.9 197.8,105.2 197.8,105.575 ; v1(198.3,202.6) 203.6,202.6 204.8,203.8 204.8,212.45 204.8,220.7 ; 198.45,191.95 198.45,192.45 200.25,194.25 ; 198.45,194.25 198.5,194.3 198.5,196.45 ; v1(198.5,103.9) 198.6,104 198.6,105.575 ; v1(198.8,171.2) 200.8,171.2 ; 198.9,94.68 198.9,99.5 199.93,100.53 205.43,100.53 208.9,104 208.9,105.6 ; 199.4,105.575 199.4,104.8 199.5,104.7 v1(199.5,102.4) ; 199.8,185.2 200.395,184.605 200.395,181.6 ; 200,196.45 200,194.5 200.25,194.25 ; 200.2,105.575 200.2,105.3 200.5,105 v1(200.5,103.9) ; v1(200.3,204.2) 200.3,206.2 ; 201.44,94.68 201.44,99.54 201.976,100.076 205.676,100.076 207.6,102 209.7,104.1 209.7,105.6 ; v1(202,102.4) 202,105 202.3,105.3 202.3,105.575 ; 202.5,193.45 201.05,193.45 200.25,194.25 ; 202.8,171.2 202.935,171.335 202.935,174.8 ; v1(202.8,204.2) 202.8,206.2 ; v1(203,103.9) 203.1,104 203.1,105.575 ; v1(203,127.5) 202.038,126.538 202.038,115.002 202.04,115 202.038,114.998 202.038,113.162 203.8,111.4 206.5,111.4 208.1,109.8 208.1,107.225 ; 203.9,105.575 203.9,104.8 204,104.7 v1(204,102.4) ; 203.98,94.68 203.98,99.38 204.2,99.6 206.2,99.6 208.1,101.5 210.7,101.5 211.8,102.6 211.8,105.6 ; 204.7,105.575 204.7,105.3 205,105 v1(205,103.9) ; 205.5,149.9 208.55,149.9 ; v1(206,109.4) 207.3,108.1 207.3,107.225 ; 206.52,94.68 206.52,99.02 208.5,101 211.1,101 212.6,102.5 212.6,105.6 ; 209.06,94.68 209.06,99.4 210.06,100.4 211.5,100.4 213.4,102.3 213.4,105.6 ; 210.55,149.9 v1(212,149.9) ; 211.6,94.68 211.6,99.001 214.2,101.601 214.2,105.6 ; 212.8,182.3 217.2,182.3 222.7,182.3 223.2,182.8 ; 213.4,107.225 213.4,116.3 v1(214,116.9) ; 214.14,94.68 214.14,100.8 214.627,101.287 224.212,101.287 226.3,103.375 226.3,105.6 ; 214.2,107.225 214.2,114.6 v1(215,115.4) ; 216.3,184.7 216.8,185.2 220.4,185.2 ; v1(216.5,102.4) 216.5,105 216.8,105.3 216.8,105.575 ; v1(216.5,110.9) 216.5,107.8 216.8,107.5 216.8,107.2 ; 216.68,94.68 216.68,99.567 217.946,100.833 224.4,100.833 227.1,103.533 227.1,105.6 ; v1(217.5,103.9) 217.6,104 217.6,105.575 ; 217.6,107.2 v1@217.6,109.5 ; 218.4,105.575 218.4,104.9 218.5,104.8 v1(218.5,102.4) ; 219.2,105.575 219.2,105.2 219.5,104.9 v1(219.5,103.9) ; 219.22,94.68 219.22,99.567 220.032,100.379 224.588,100.379 227.9,103.691 227.9,105.6 ; v1(221,102.4) 221,105 221.3,105.3 221.3,105.575 ; v1(221,110.9) 221,107.8 221.3,107.5 221.3,107.2 ; 221.76,94.68 221.76,98.677 223.008,99.925 224.776,99.925 228.7,103.849 228.7,105.6 ; v1(222,103.9) 222.1,104 222.1,105.575 ; v1(222,109.4) 222.1,109.3 222.1,107.2 ; 222.9,105.575 222.9,104.7 223,104.6 v1(223,102.4) ; 222.9,107.2 223,107.3 v1(223,110.9) ; 223.7,105.575 223.7,105.2 224,104.9 v1(224,103.9) ; 223.7,107.2 223.7,109.1 v1(224,109.4) ; 223.8,184.8 223.2,184.8 223.5,184.8 230.9,184.8 232.3,186.2 ; 224.3,94.68 224.425,94.805 224.425,98.932 225.843,100.35 227.2,100.35 230.8,103.95 230.8,105.6 ; 226.3,107.225 226.3,110.7 v1(226.5,110.9) ; v1@226.5,142.9 v1(226.5,143.4) ; 226.84,94.68 226.975,94.815 226.975,98.95 231.6,103.575 231.6,105.6 ; 227.1,107.225 227.1,109 v1(227.5,109.4) ; 227.41,178.32 227.41,181.01 228.55,182.15 233.75,182.15 234.85,183.25 234.85,187.4 233.51,188.74 232.3,188.74 ; 227.9,107.225 227.9,108.3 228.5,108.9 v1(228.5,110.9) ; 228.7,107.225 228.7,107.7 229.5,108.5 v1(229.5,109.4) ; 229.38,94.68 229.475,94.775 229.475,99.875 232.4,102.8 232.4,105.6 ; 229.41,178.32 232.22,178.32 ; v1(230.5,110.9) 230.5,107.8 230.8,107.5 230.8,107.225 ; v1@231.5,108.9 231.6,108.8 231.6,107.225 ; 231.92,94.68 231.95,94.71 231.95,99.9 233.2,101.15 233.2,105.6 ; 232.4,107.225 232.412,107.237 v1@232.412,110.9 ; 233.2,107.225 v1@233.2,109.4 ; v1(234,146.9) 234.5,146.4 244.5,146.4 247.95,149.85 250.5,149.85 253.478,149.85 ; 234.46,94.68 234.46,99.96 235.8,101.3 235.8,105.6 ; v1(235,145.4) 235.5,145.9 252.5,145.9 256.4,145.9 256.45,145.85 ; 236.6,105.6 236.6,101.2 237.02,100.78 237.02,94.64 ; 237.053,125.638 237.053,126.953 238.5,128.4 ; 237.053,134.738 237.053,136.697 235.646,138.104 235.646,142.488 237.637,144.479 250.788,144.479 253.367,141.9 256.5,141.9 ; 237.4,105.6 237.4,102 239.54,99.86 239.54,94.68 ; 238.2,105.6 238.2,103.6 242.08,99.72 242.08,94.68 ; v1@238.3,123.4 v1(238.323,123.423) 238.323,125.638 ; 238.323,134.738 238.323,136.069 236.1,138.292 236.1,142.3 237.825,144.025 250.6,144.025 255.225,139.4 256.5,139.4 ; 238.7,139.55 240.863,139.55 240.863,134.738 ; 239.466,130.188 239.593,130.315 ; v1(240,110.9) 240,107.8 240.3,107.5 240.3,107.225 ; 240.3,105.6 240.3,103.574 244.62,99.254 244.62,94.68 ; v1(241,109.4) 241.1,109.3 241.1,107.225 ; 241.1,105.6 241.1,103.416 244.759,99.757 246.543,99.757 247.16,99.14 247.16,94.68 ; 241.9,105.6 241.9,103.258 244.947,100.211 249.289,100.211 249.7,99.8 249.7,94.68 ; 241.9,107.225 241.912,107.237 241.912,110.812 v1(242,110.9) ; v1@242.1,123.4 v1(242.133,123.433) 242.133,125.638 ; 242.133,134.738 242.133,140.453 242.868,141.188 ; 242.7,105.6 242.7,103.1 245.135,100.665 251.435,100.665 252.24,99.86 252.24,94.68 ; 242.7,107.225 242.7,109.1 v1(243,109.4) ; 243.163,141.188 243.301,141.05 245.2,141.05 ; v1(245,103.9) 245,105 245.3,105.3 245.3,105.575 ; v1@245.943,120.9 245.943,125.638 ; v1(246,102.4) 246,105.575 ; 246.9,105.575 246.9,104 v1(247,103.9) ; 247.7,105.575 247.7,104.56 248,104.26 v1(248,102.4) ; v1(249,103.9) 249,104.5 249.8,105.3 249.8,105.575 ; 249.753,125.638 249.753,123.838 250.896,122.695 253.69,122.695 254.706,123.711 254.706,128.806 256.275,130.375 265.025,130.375 268.168,127.232 268.168,125.108 267.533,124.473 264.358,124.473 258.5,124.473 ; 249.753,134.738 249.753,136.653 251.362,138.262 259.438,138.262 269.584,128.116 269.584,120.809 266.898,118.123 265.675,116.9 258.5,116.9 ; v1(250,102.4) 250,104.258 250.6,104.858 250.6,105.575 ; 250,114 250.1,113.9 ; 250.5,149.9 253.428,149.9 253.478,149.85 ; v1(251,103.9) 251.4,104.3 251.4,105.575 ; 251.023,125.638 251.023,123.838 251.712,123.149 253.502,123.149 254.252,123.899 254.252,128.923 256.158,130.829 265.213,130.829 268.622,127.42 268.622,122.387 266.898,120.663 259.737,120.663 258.5,121.9 ; 251.023,134.738 251.023,137.173 251.658,137.808 259.184,137.808 269.13,127.862 269.13,121.33 267.193,119.393 264.358,119.393 258.627,119.393 258.5,119.266 ; v1@252.2,102.44 252.2,105.575 ; 252.293,125.638 252.293,126.505 253.4,127.612 253.4,129.7 256.5,132.8 256.5,133.236 ; v1(254.5,119.4) 256.5,119.4 ; 255.896,134.934 255.896,135.776 ; 256.15,118.916 256.5,119.266 ; 256.5,121.9 256.5,124.473 256.5,126.79 256.214,127.077 256.5,127.363 256.5,128.4 257.6,129.5 261.871,129.5 264.358,127.013 ; 258.5,132.9 258.85,133.25 258.85,135.9 ; 258.5,139.4 261.3,139.4 268.154,132.546 272.973,132.546 276.626,128.893 ; 258.5,141.9 259.442,141.9 268.342,133 274.059,133 277.715,129.344 279.3,127.759 279.3,117.393 278.15,116.243 ; 258.55,144.9 261.5,144.9 ; 258.55,148.9 261.5,148.9 ; 258.85,134 258.852,133.998 v1(260.548,133.998) ; 263.5,144.9 275.77,132.63 277.5,132.63 ; 263.5,148.9 274.77,137.63 277.5,137.63 ; v1(79.4,202.2) 79.4,201.8 v1(79.4,202.2) ; 126.478,149.85 129.45,149.85 126.478,149.85 ; v1(183.3,202.2) 183.3,201.8 v1(183.3,202.2) ; 253.478,149.85 256.45,149.85 253.478,149.85
  Top Layer w0.3: 66.765,192.8 66.765,191.535 67.9,190.4 v1(68.9,190.4) ; v1(68.9,174.2) 74.3,174.2 ; 69.305,192.8 69.305,193.605 v1(70.4,194.7) ; v1(70.4,169.7) 70.4,168.7 72.4,166.7 75.15,166.7 75.25,166.6 75.3,166.65 ; 76.25,168.75 76.3,168.8 ; 170.665,192.8 170.665,191.535 171.8,190.4 v1(172.8,190.4) ; v1(172.8,174.2) 178.2,174.2 ; 173.205,192.8 173.205,193.605 v1(174.3,194.7) ; v1(174.3,169.7) 174.3,168.7 176.3,166.7 179.05,166.7 179.15,166.6 179.2,166.65 ; 180.15,168.75 180.2,168.8
  Top Layer w0.4: 104.754,126.275 ccw(c104.554,126.275) 104.754,126.275 ; 231.754,126.275 ccw(c231.554,126.275) 231.754,126.275
  Top Layer w0.5: v1@50.075,124.325 52.65,124.325 ; v1(57,120.4) 59.425,117.975 61.85,117.975 ; 62,135.495 60.005,135.495 v1(59,136.5) 59,148.2 62.5,151.7 75.5,151.7 75.96,151.24 75.96,149.9 ; 96.495,181.6 v1(96.499,179.234) ; 108.783,125.638 108.783,127.683 v1(109.5,128.4) v1@109.6,128.4 ; 108.783,134.738 108.783,130.823 109.418,130.188 v1(109.5,130.2) 109.5,130.188 112.466,130.188 ; 112.593,130.315 112.593,134.738 ; 116.403,131.903 116.403,134.738 ; 117.5,131.9 117.673,132.073 117.673,134.738 ; 118.943,134.738 120.213,134.738 ; 120.577,138.977 120.213,138.613 120.213,136.463 120.213,134.738 ; 121.483,125.638 121.483,128.383 ; 121.483,134.738 121.483,132.717 122.3,131.9 v1(123.5,131.9) ; 123,114 123,117.1 v1(125.3,119.4) ; 123.1,114.1 123.3,113.9 ; v1@125.3,131.9 v1(125.293,131.9) ; 126.9,113.9 129.15,113.9 129.15,116.884 129.15,118.916 ; 129.15,135.9 125.293,135.9 v1(125.293,131.9) ; v1@177.075,124.325 179.65,124.325 ; v1(184,120.4) 186.425,117.975 188.85,117.975 ; 189,135.495 187.005,135.495 v1(186,136.5) 186,148.2 189.5,151.7 202.5,151.7 202.96,151.24 202.96,149.9 ; 200.395,181.6 v1(200.399,179.234) ; 235.783,125.638 235.783,127.683 v1(236.5,128.4) v1@236.6,128.4 ; 235.783,134.738 235.783,130.823 236.418,130.188 v1(236.5,130.2) 236.5,130.188 239.466,130.188 ; 239.593,130.315 239.593,134.738 ; 243.403,131.903 243.403,134.738 ; 244.5,131.9 244.673,132.073 244.673,134.738 ; 245.943,134.738 247.213,134.738 ; 247.577,138.977 247.213,138.613 247.213,136.463 247.213,134.738 ; 248.483,125.638 248.483,128.383 ; 248.483,134.738 248.483,132.717 249.3,131.9 v1(250.5,131.9) ; 250,114 250,117.1 v1(252.3,119.4) ; 250.1,114.1 250.3,113.9 ; v1@252.3,131.9 v1(252.293,131.9) ; 253.9,113.9 256.15,113.9 256.15,116.884 256.15,118.916 ; 256.15,135.9 252.293,135.9 v1(252.293,131.9) ; 112.466,130.188 120.213,130.188 ; 112.466,130.188 120.213,130.188 ; 120.213,130.188 124.912,130.188 ; 120.213,130.188 124.912,130.188 ; 120.213,130.188 120.213,134.738 ; 120.213,130.188 124.912,130.188 ; 124.912,130.188 125.293,130.569 v1(125.293,131.9) ; 239.466,130.188 247.213,130.188 ; 239.466,130.188 247.213,130.188 ; 247.213,130.188 251.912,130.188 ; 247.213,130.188 251.912,130.188 ; 247.213,130.188 247.213,134.738 ; 247.213,130.188 251.912,130.188 ; 251.912,130.188 252.293,130.569 v1(252.293,131.9)
  Top Layer w1: 33.5,107.28 38.38,102.4 v1(49.1,102.4) ; 48.9,193.82 51.38,193.82 ; 48.9,198.9 50.8,198.9 51.4,198.3 51.4,189.2 52.35,188.25 58.55,188.25 ; 49.04,94.68 49.04,102.34 v1(49.1,102.4) ; v1(50,128.9) 50.022,128.922 v1@56.6,128.922 ; 54.14,94.64 v1(54.14,102.4) ; 56.4,182.95 56.4,180.6 57.3,179.7 v1(73.4,179.7) v1(79.9,179.7) 96.476,179.7 96.5,179.676 v1(96.499,179.234) ; 57.15,203 66.765,203 ; 57.15,209.5 64.8,209.5 67.217,211.917 67.217,219.017 ; v1(57.5,106.4) 53.1,106.4 v1(49.1,102.4) ; 62.7,183.2 68.3,183.2 70.9,185.8 ; 62.775,206.7 v1(65.4,206.7) ; 62.775,213.2 62.775,213.975 63.915,215.115 63.915,220.54 ; 66.765,192.2 66.765,202.815 69.9,205.95 69.9,213.2 ; 67.217,222.572 67.217,217.35 71.65,217.35 72.8,216.2 72.8,200.975 70.95,199.125 ; 68.035,192.2 68.035,196.21 70.025,198.2 ; 70.95,185.85 73.9,185.85 76.55,183.2 v1(78.4,183.2) ; 73.25,137.4 73.5,137.65 v1(73.5,139.9) ; v1(78.5,123.4) 81.4,123.4 v1(82.9,121.9) ; v1(79.9,188.7) v1@85.7,194.5 ; v1(79.9,194.7) v1(85.9,188.7) ; v1(88,128.9) v1(92,132.9) ; v1(88,132.9) v1(92,128.9) ; 111.5,128.4 v1(123.5,128.4) ; v1(115.5,131.9) 116.4,131.9 ; 116.1,185.2 116.1,188.74 128.4,188.74 ; 116.403,131.903 116.4,131.9 ; 123.5,147.9 125.5,147.9 v1(127.5,147.9) ; v1@127.55,143.95 129.45,143.95 ; v1@127.55,147.95 129.45,147.95 ; 131.85,127.013 131.863,127 v1(133.5,127) ; 152.8,193.82 155.28,193.82 ; 152.8,198.9 154.7,198.9 155.3,198.3 155.3,189.2 156.25,188.25 162.45,188.25 ; 160.3,182.95 160.3,180.6 161.2,179.7 v1(177.3,179.7) v1(183.8,179.7) 200.376,179.7 200.4,179.676 v1(200.399,179.234) ; 160.5,107.28 165.38,102.4 v1(176.1,102.4) ; 161.05,203 170.665,203 ; 161.05,209.5 168.7,209.5 171.117,211.917 171.117,219.017 ; 166.6,183.2 172.2,183.2 174.8,185.8 ; 166.675,206.7 v1(169.3,206.7) ; 166.675,213.2 166.675,213.975 167.815,215.115 167.815,220.54 ; 170.665,192.2 170.665,202.815 173.8,205.95 173.8,213.2 ; 171.117,222.572 171.117,217.35 175.55,217.35 176.7,216.2 176.7,200.975 174.85,199.125 ; 171.935,192.2 171.935,196.21 173.925,198.2 ; 174.85,185.85 177.8,185.85 180.45,183.2 v1(182.3,183.2) ; 176.04,94.68 176.04,102.34 v1(176.1,102.4) ; v1(177,128.9) 177.022,128.922 v1@183.6,128.922 ; 181.14,94.64 v1(181.14,102.4) ; v1(183.8,188.7) v1@189.6,194.5 ; v1(183.8,194.7) v1(189.8,188.7) ; v1(184.5,106.4) 180.1,106.4 v1(176.1,102.4) ; 200.25,137.4 200.5,137.65 v1(200.5,139.9) ; v1(205.5,123.4) 208.4,123.4 v1(209.9,121.9) ; v1(215,128.9) v1(219,132.9) ; v1(215,132.9) v1(219,128.9) ; 220,185.2 220,188.74 232.3,188.74 ; 238.5,128.4 v1(250.5,128.4) ; v1(242.5,131.9) 243.4,131.9 ; 243.403,131.903 243.4,131.9 ; 250.5,147.9 252.5,147.9 v1(254.5,147.9) ; v1@254.55,143.95 256.45,143.95 ; v1@254.55,147.95 256.45,147.95 ; 258.85,127.013 258.863,127 v1(260.5,127) ; 116.4,131.9 117.5,131.9 116.4,131.9 ; 243.4,131.9 244.5,131.9 243.4,131.9
  Top Layer w2: 56.4,183.2 56.4,188.25 ; 160.3,183.2 160.3,188.25
  Bottom Layer w0.2: v1(58.5,125.9) v1(78.5,125.9) ; v1(65,124.9) v1(77,124.9) ; v1(65,131.4) v1(75,131.4) ; v1(66,140.4) v1(71.4,140.4) ; 82.9,128.3 82.95,128.25 ; v1(89.9,118.4) v1(101.1,118.4) ; v1(93,140.9) 93.201,140.699 97.901,140.699 101.115,137.485 101.115,132.033 103.6,129.548 103.6,124.2 100.8,121.4 v1(94.5,121.4) ; v1(185.5,125.9) v1(205.5,125.9) ; v1(192,124.9) v1(204,124.9) ; v1(192,131.4) v1(202,131.4) ; v1(193,140.4) v1(198.4,140.4) ; 209.9,128.3 209.95,128.25 ; v1(216.9,118.4) v1(228.1,118.4) ; v1(220,140.9) 220.201,140.699 224.901,140.699 228.115,137.485 228.115,132.033 230.6,129.548 230.6,124.2 227.8,121.4 v1(221.5,121.4)
  Bottom Layer w0.25: v1(87,116.9) 87,118 88.965,119.965 100.189,119.965 104.1,123.876 ; v1(88,115.4) 88,118.358 89.153,119.511 100.377,119.511 104.554,123.688 ; v1(214,116.9) 214,118 215.965,119.965 227.189,119.965 231.1,123.876 ; v1(215,115.4) 215,118.358 216.153,119.511 227.377,119.511 231.554,123.688